# Altium PCB 起跑.PcbDoc
Units mil, origin at the board's own origin, x right, y up, seen from the top; angles counter-clockwise.
Board outline 3947.04 x 532.59 mil, 2 copper layers (Top Layer, Bottom Layer); 11 components, 3 nets, 24 pads, 1 vias.
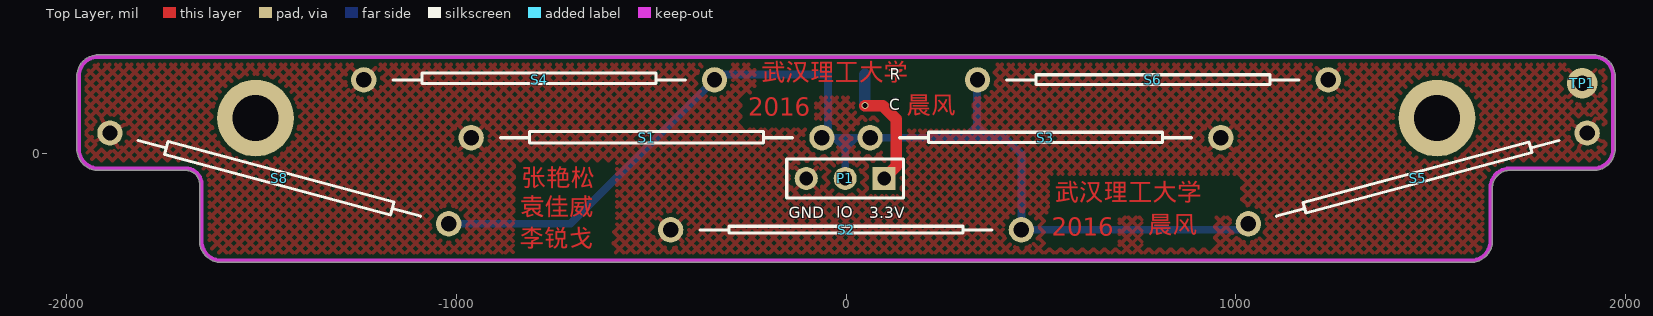
[diagram p0: Top Layer view]
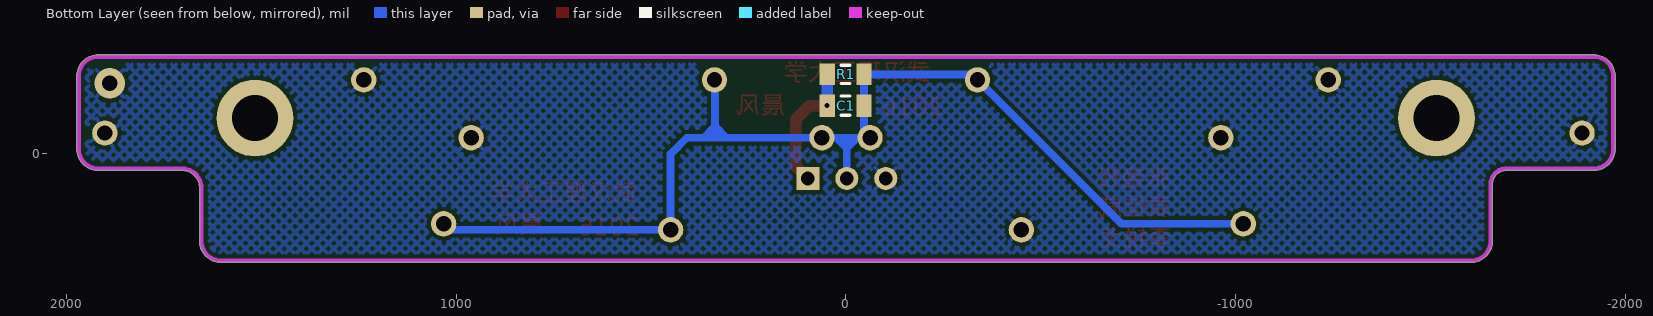
[diagram p1: Bottom Layer view, seen from below]

## Layer stack, top to bottom
Top Layer: signal copper 1.4
Dielectric: dielectric 12.6, FR-4, Dk 4.8
Bottom Layer: signal copper 1.4

## Board outline
-1658.56,-79.83 ccw(c-1694,-79.83) -1694,-44.39 -1918.5,-44.39 cw(c-1918.5,10.63) -1973.52,10.63 -1973.52,196.97 cw(c-1918.5,196.97) -1918.5,251.98 1918.5,251.98 cw(c1918.5,196.97) 1973.52,196.97 1973.52,10.63 cw(c1918.5,10.63) 1918.5,-44.39 1703.54,-44.39 ccw(c1703.54,-89.37) 1658.56,-89.37 1658.56,-225.59 cw(c1603.54,-225.59) 1603.54,-280.61 -1603.54,-280.61 cw(c-1603.54,-225.59) -1658.56,-225.59

## Design rules (kind name [scope] priority, off if disabled: settings)
Clearance [All] p1: gap=10
PolygonConnect [All] p1: connectstyle=Relief reliefconductorwidth=10 reliefentries=4 polygonreliefangle="45 Angle" airgapwidth=10
RoutingVias [All] p1: holewidth=28 width=50 viastyle="Through Hole" minholewidth=28 minwidth=50 maxholewidth=28 maxwidth=50
SilkToSolderMaskClearance SilkscreenOverComponentPads [IsPad] p1: minsilkscreentomaskgap=10 clearancetoexposedcopper=TRUE
SolderMaskExpansion [All] p1: expansion=4
Width [All] p1: maxlimit=50 minlimit=6 preferedwidth=30 minimp=50.000000 maximp=50.000000 favimp=50.000000
27 further rules are at their usual default settings.

## Components (designator, comment, footprint, x,y, rotation, side; value= is the part's Value field where it differs from the comment)
C1 "Cap" C2012 1,121.69 r180 bottom
P1 "Header 3" HDR1X3 98,-65 r180 top
R1 "Res2" R2012 1,201.69 r180 bottom
S1 "SW-PB" AXIAL-0.9 -511.81,39.37 r180 top
S2 "SW-PB" AXIAL-0.9 0,-196.85 r180 top
S3 "SW-PB" AXIAL-0.9 511.81,39.37 r0 top
S4 "SW-PB" AXIAL-0.9 -787.4,188 r180 top
S5 "SW-PB" AXIAL-0.9 1467,-65 r15 top
S6 "SW-PB" AXIAL-0.9 787.4,188 r0 top
S8 "SW-PB" AXIAL-0.9 -1454,-65 r165 top
TP1 "TEST PAD" PIN 1889,179 r0 top

## Footprints (in the part's own frame and the unit in brackets; to place one, negate y for a bottom-side part, rotate by r counter-clockwise, add the part's x,y. Pads: shape width x height; smd on the part's side, far side on the other; paste and mask are expansions set on the pad)
AXIAL-0.9 [mm] "Axial Device, Thru-Hole; 2 Leads; 0.9 in Pin Spacing"
  round 1.65 hole 1: 1(-11.43,0) 2(11.43,0)
  silkscreen extent -9.53,-0.41 9.53,0.36
C2012 [mm] "Chip Capacitor, 2-Leads, Body 2.0x1.2mm, IPC Low Density"
  rect 1x1.45 smd: 1(-1.2,0) 2(1.2,0)
  silkscreen extent -0.3,-0.63 0.3,0.63, body extent -0.98,-0.6 1.02,0.6, height 0.5
HDR1X3 [mm] "Connector; Header; 3 Position"
  rect 1.5x1.5 hole 0.9: 1(0,0)
  round 1.5 hole 0.9: 2(2.54,0) 3(5.08,0)
  silkscreen extent -1.27,-1.27 6.35,1.27, body extent -1.27,-1.27 6.35,1.27, height 7.58
PIN [mm]
  round 2 hole 1: 1(0,0)
R2012 [mm] "Chip Resistor, 2-Leads, Body 2.0x1.2mm, IPC Low Density"
  rect 1x1.4 smd: 1(-1.2,0) 2(1.2,0)
  silkscreen extent -0.3,-0.6 0.3,0.6, body extent -0.98,-0.6 1.02,0.6, height 0.5

## Part data
C1: "Capacitor"
P1: "Header, 3-Pin"
R1: "Resistor"
S1 S2 S3 S4 S5 S6 S8: "Switch"

## Free pads (board coordinates)
  round 196.85 hole 118.11: 0(1516.48,89.48) 1(-1515.02,89.48)

## Via types
v1: diameter 18, hole 13, Top Layer to Bottom Layer, 1 vias

## Nets (pads, with @x,y where several pads share a name; then routed paths per layer and width w, separated by ;. In a path a pad name is that pad's centre, name@x,y a point inside that pad or via, vN(x,y) a via of type N, cw(c..) or ccw(c..) an arc to the next point about the centre after c; other vN are vias at no path point)
3.3V: C1.1 P1.1 R1.1 | length 339.8
  Top Layer w30: v1(48.24,121.69) 94.31,121.69 128.76,87.24 128.76,-34.24 P1.1
  Bottom Layer w30: v1(48.24,121.69) R1.1
GND: P1.3 S1.2 S2.2 S3.2 S4.2 S5.2 S6.2 S8.2 TP1.1
IO1: C1.2 P1.2 R1.2 S1.1 S2.1 S3.1 S4.1 S5.1 S6.1 S8.1 | length 3068.5
  Bottom Layer w20: S8.1 -706.87,-181.47 S4.1 -323.72,201.69 R1.2 -46.24,54.94 S1.1 -28.37,39.37 ; P1.2 -2,13 ; S3.1@35,39.37 24.37,39.37 ; S6.1@339,199 336,196 336,68 ; 388,39.37 364.63,39.37 ; S5.1 1016.95,-196.85 S2.1 450,-2.26 408.37,39.37 364.63,39.37 ; -28.37,39.37 0,39.37 ; -28.37,39.37 -2,13 ; -2,13 24.37,39.37 ; -2,13 -2,37.37 0,39.37 ; 0,39.37 24.37,39.37 ; 24.37,39.37 S3.1 307.37,39.37 ; 307.37,39.37 336,39.37 ; 307.37,39.37 336,68 ; 336,39.37 364.63,39.37 ; 336,39.37 336,68 ; 336,68 364.63,39.37

## Polygon pours and split planes (outlines as drawn)
GND on Top Layer "Top Layer-GND" (hatched 45Degree grid 20 track 10, remove dead copper, pour order 2): -1986,294 -1986,-274 -1542,-274 1968.5,-274 1968.5,196.97 1968.5,243 1884,243
GND on Bottom Layer "Top Layer-GND" (hatched 45Degree grid 20 track 10, remove dead copper, pour order 4): -1817,248 -1968.5,248 -1968.5,154 -1968.5,-278 -1458,-278 1971,-278 1971,126 1971,246.97 1822,246.97

## Keep-outs
Keep-Out Layer:
  lines w10: -1574.8,-275.59 1574.8,-275.59 1603.54,-275.59 ccw(c1603.54,-225.59) 1653.54,-225.59 1653.54,-200 1653.54,-128 1653.54,-89.37 cw(c1703.54,-89.37) 1703.54,-39.37 1771.65,-39.37 1863,-39.37 1918.5,-39.37 ccw(c1918.5,10.63) 1968.5,10.63 1968.5,50 1968.5,187 1968.5,196.97 ccw(c1918.5,196.97) 1918.5,246.97 1911,246.97 -1788.03,246.97 -1918.5,246.97 ccw(c-1918.5,196.97) -1968.5,196.97 -1968.5,10.63 ccw(c-1918.5,10.63) -1918.5,-39.37 -1734,-39.37 -1694,-39.37 cw(c-1694,-79.83) -1653.54,-79.83 -1653.54,-89.37 -1653.54,-225.59 ccw(c-1603.54,-225.59) -1603.54,-275.59 -1571,-275.59

## Other copper
Top Layer:
  text "武汉理工大学" at -217,170 h78.74
  text "晨风" at 156,85 h78.74
  text "2016" at -251,80 h78.74
  text "张艳松" at -832,-100 h78.74
  text "武汉理工大学" at 536,-138 h78.74
  text "袁佳威" at -836,-175 h78.74
  text "晨风" at 776,-221 h78.74
  text "2016" at 528,-228 h78.74
  text "李锐戈" at -837,-256 h78.74

## Silkscreen, mask and mechanical layers (free items; w line width, h text height)
Top Overlay:
  text "R" at 112,178 h50
  text "C" at 111,100 h50
  text "IO" at -25,-176 h50
  text "GND" at -147,-177 h50
  text "3.3V" at 60,-177 h50
Mechanical 15:
  lines w10: -1515.02,89.48 1142.46,-68 ; -1141,-68 1516.48,89.48 ; -40,-65 560,-65 ; 0,-0.39 0,1406